# Altium PCB PCB1.PcbDoc
Units mil, origin at the board's own origin, x right, y up, seen from the top; angles counter-clockwise.
Board outline 3346.46 x 2204.72 mil, 2 copper layers (Top Layer, Bottom Layer); 34 components, 12 nets, 125 pads, 104 vias.
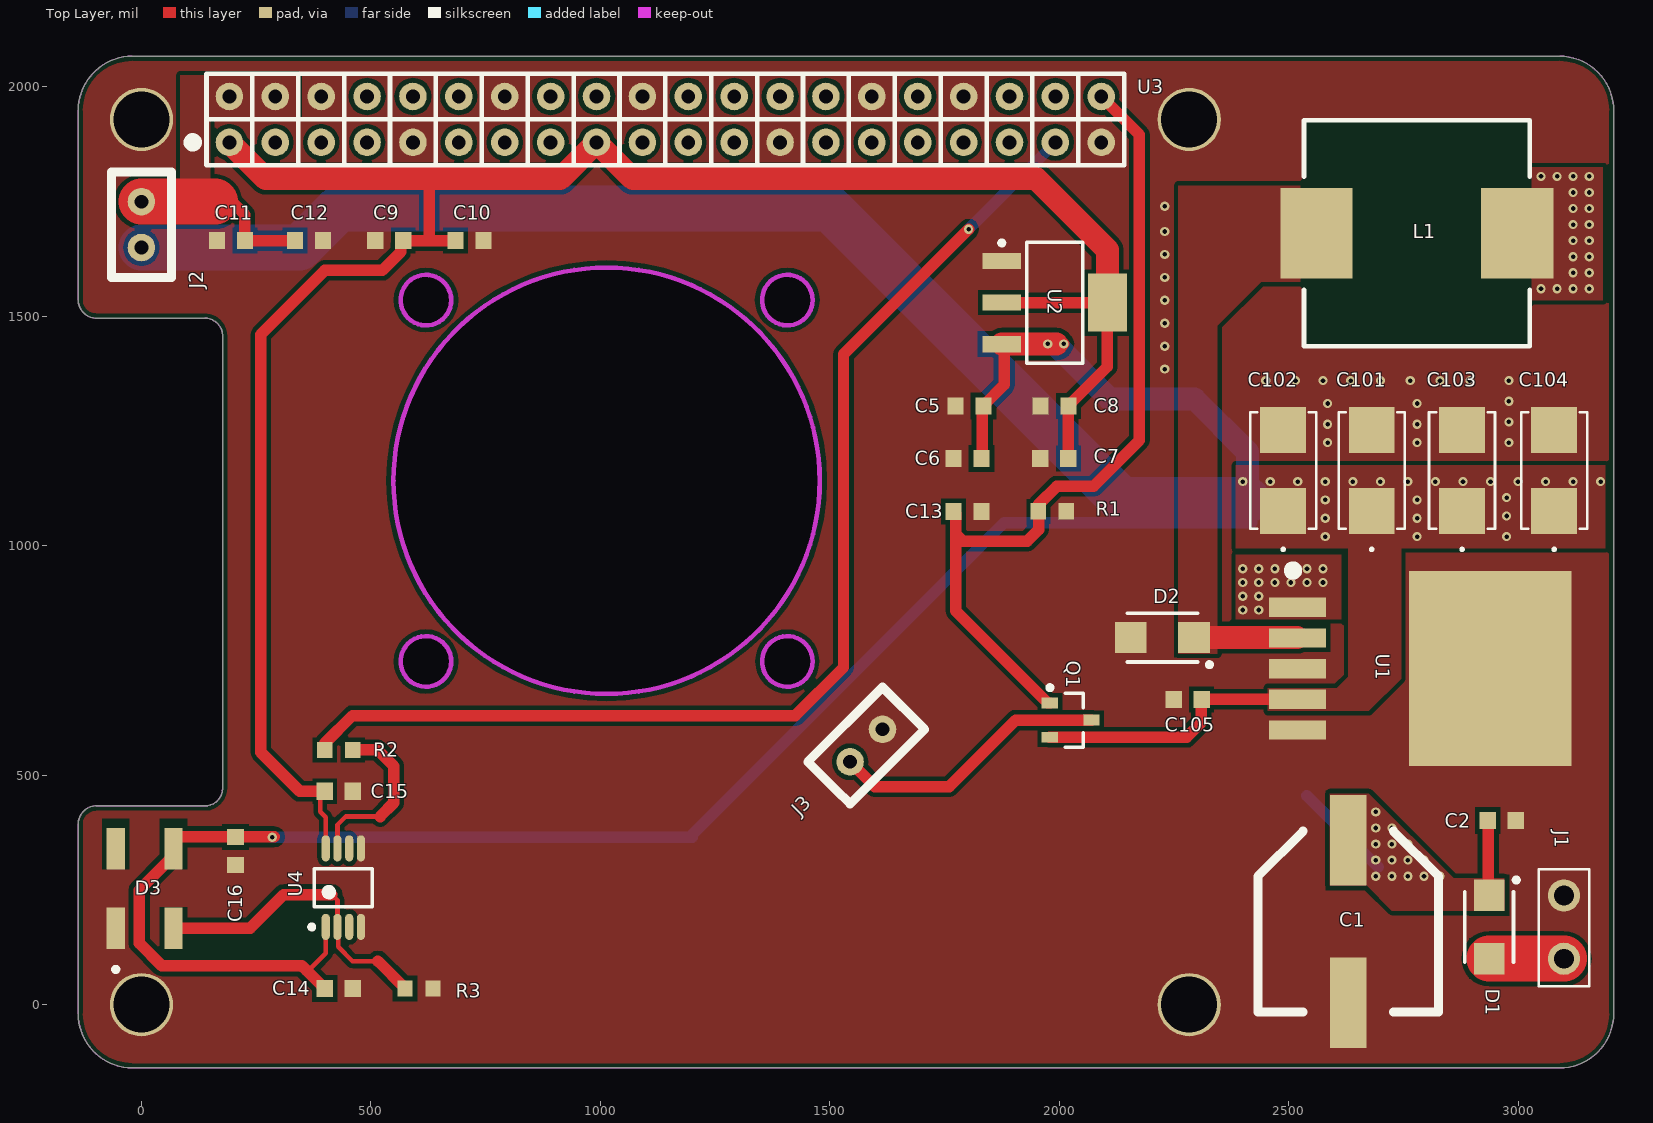
[diagram p0: Top Layer view]
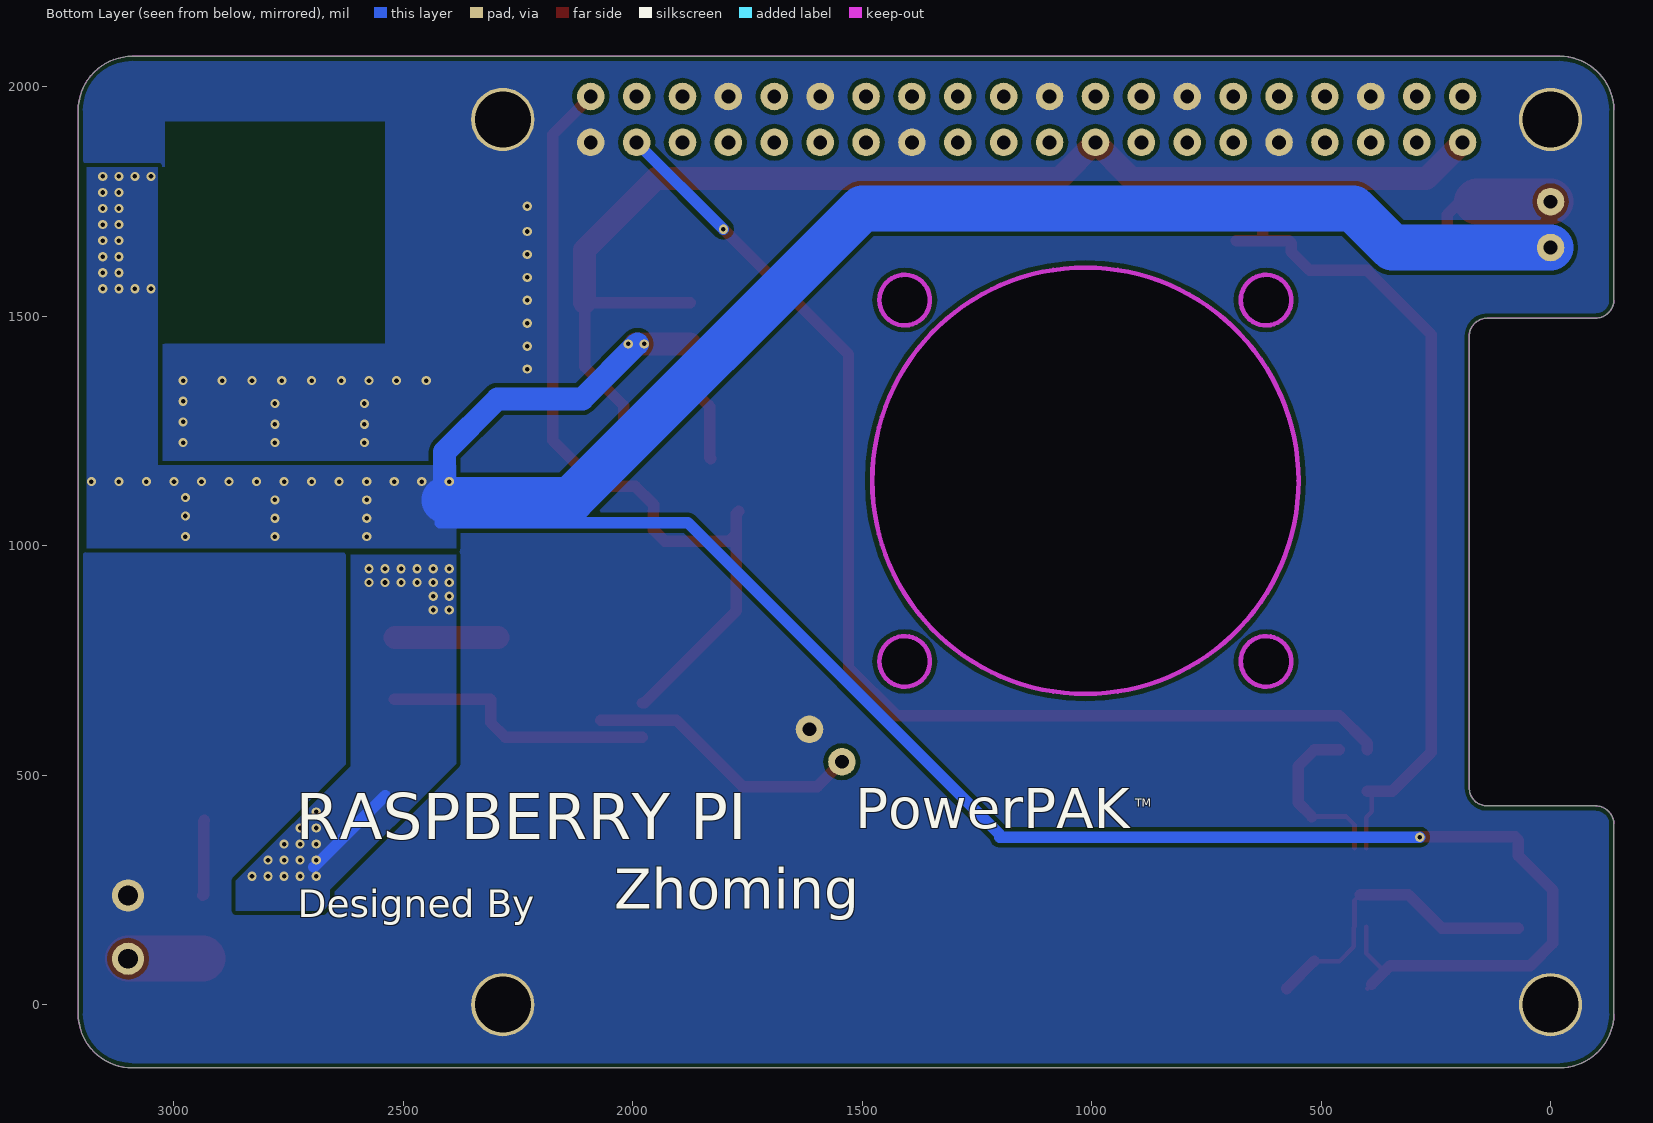
[diagram p1: Bottom Layer view, seen from below]
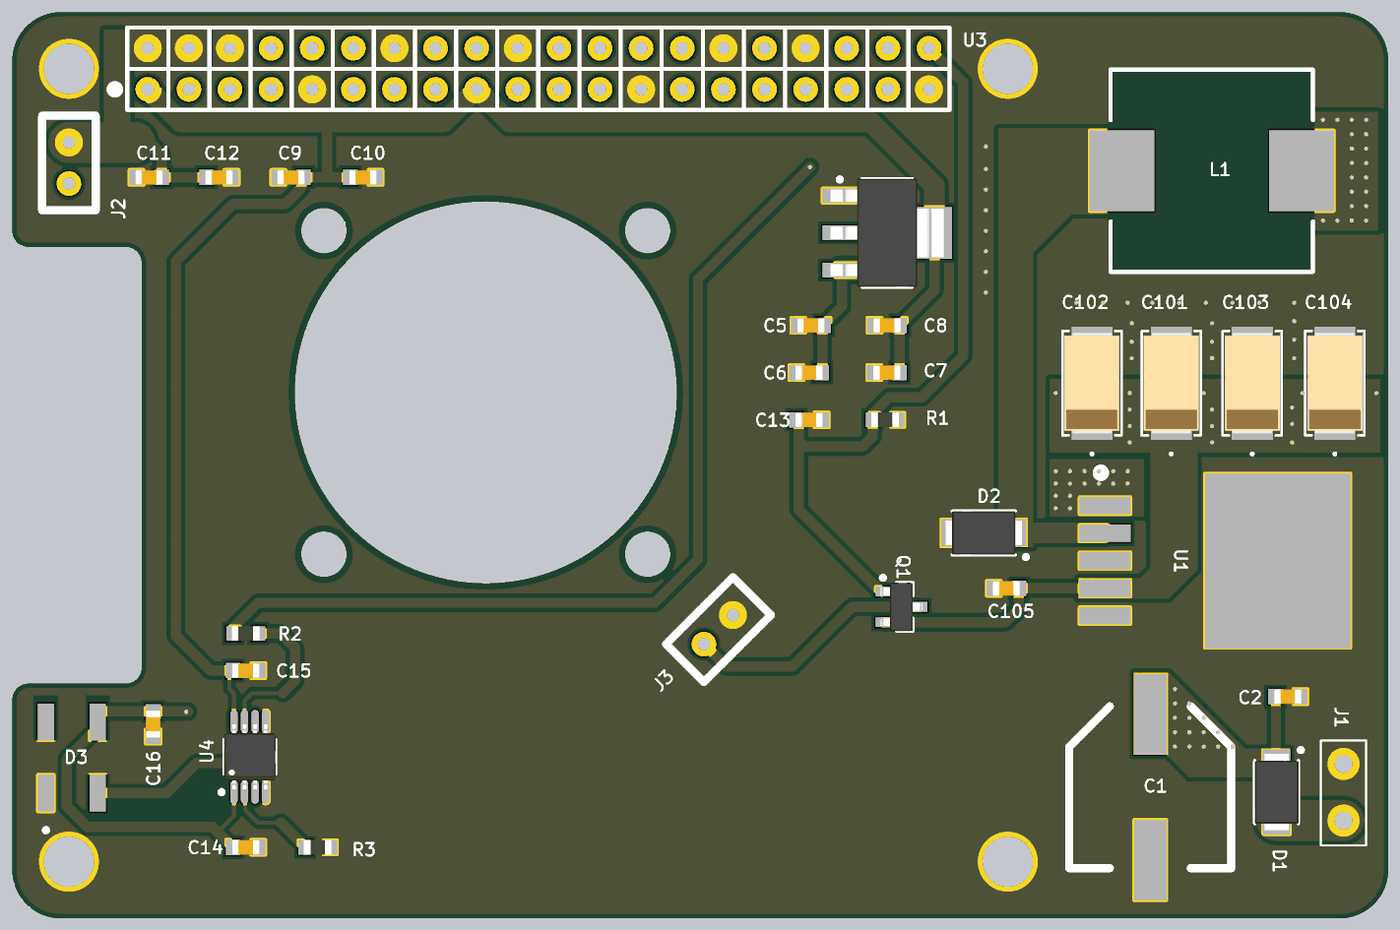
[diagram p2: 3D render of the assembled board from above, using the file's embedded part models]

## Layer stack, top to bottom
Top Solder: solder mask 0.4, Solder Resist, Dk 3.5
Top Layer: signal copper 1.4
Dielectric 1: dielectric 12.6, FR-4, Dk 4.8
Bottom Layer: signal copper 1.4
Bottom Solder: solder mask 0.4, Solder Resist, Dk 3.5

## Board outline
-137.8,-19.69 -137.8,393.7 cw(c-98.43,393.7) -98.43,433.07 137.8,433.07 ccw(c137.8,472.44) 177.17,472.44 177.17,1456.69 ccw(c137.8,1456.69) 137.8,1496.06 -98.43,1496.06 cw(c-98.43,1535.43) -137.8,1535.43 -137.8,1948.82 cw(c-19.69,1948.82) -19.69,2066.93 3090.55,2066.93 cw(c3090.55,1948.82) 3208.66,1948.82 3208.66,-19.69 cw(c3090.55,-19.69) 3090.55,-137.8 -19.69,-137.8 cw(c-19.69,-19.69)
cut-out: 1352.36,748.03 ccw(c1407.48,748.03) 1407.48,692.91 ccw(c1407.48,748.03) 1462.6,748.03 ccw(c1407.48,748.03) 1407.48,803.15 ccw(c1407.48,748.03)
cut-out: 564.96,748.03 ccw(c620.08,748.03) 620.08,692.91 ccw(c620.08,748.03) 675.2,748.03 ccw(c620.08,748.03) 620.08,803.15 ccw(c620.08,748.03)
cut-out: 1352.36,1535.43 ccw(c1407.48,1535.43) 1407.48,1480.31 ccw(c1407.48,1535.43) 1462.6,1535.43 ccw(c1407.48,1535.43) 1407.48,1590.55 ccw(c1407.48,1535.43)
cut-out: 620.08,1480.31 cw(c620.08,1535.43) 564.96,1535.43 cw(c620.08,1535.43) 620.08,1590.55 cw(c620.08,1535.43) 675.2,1535.43 cw(c620.08,1535.43)
cut-out: 549.21,1141.73 ccw(c1013.78,1141.73) 1013.78,677.17 ccw(c1013.78,1141.73) 1478.35,1141.73 ccw(c1013.78,1141.73) 1013.78,1606.3 ccw(c1013.78,1141.73)
cut-out: 896.7,1595.7

## Design rules (kind name [scope] priority, off if disabled: settings)
Clearance [All] p1: gap=10 ignorepadtopadclearanceinfootprint=FALSE except(0: Arc-Hole Track-Hole SMDPad-Hole THPad-Hole Via-Hole Fill-Hole Poly-Hole Region-Hole Text-Hole; 5: SMDPad-SMDPad SMDPad-Text)
HoleSize [All] p1: absolutevalues=TRUE maxlimit=500 minlimit=1 maxpercent=80.000 minpercent=20.000
PolygonConnect [All] p1: connectstyle=Direct reliefconductorwidth=10 reliefentries=4 polygonreliefangle="90 Angle" airgapwidth=10
RoomDefinition Sheet1 [InComponentClass('Sheet1')] p1 off: confinementstyle=ConfineIn formatcopy=TRUE lockcomponents=FALSE outline -2608.3,-2107.3 -2558.3,-2107.3 -2558.3,-2147.3 -2608.3,-2147.3
RoutingVias [All] p1: holewidth=10 width=10 viastyle="Through Hole" minholewidth=10 minwidth=10 maxholewidth=50 maxwidth=50
SilkToSolderMaskClearance [IsPad] p1: minsilkscreentomaskgap=2 clearancetoexposedcopper=TRUE
SolderMaskExpansion [All] p1: expansion=4
Width [All] p1: maxlimit=500 minlimit=5 preferedwidth=25 minimp=50.000000 maximp=50.000000 favimp=50.000000
28 further rules are at their usual default settings.

## Components (designator, comment, footprint, x,y, rotation, side; value= is the part's Value field where it differs from the comment)
C1 "ALCAP 560u" alcap-560uF 2629.92,181.1 r270 top
C2 "CAP_0603 1u" CAP_0603 2964.57,401.57 r180 top
C5 "CAP_0603 1u" CAP_0603 1804.49,1305 r0 top
C6 "CAP_0603 1u" CAP_0603 1800,1190 r0 top
C7 "CAP_0603 1u" CAP_0603 1989.49,1190 r0 top
C8 "CAP_0603 1u" CAP_0603 1990,1305 r0 top
C9 "CAP_0603 1u" CAP_0603 540,1665 r0 top
C10 "CAP_0603 0.1u" CAP_0603 715,1665 r180 top
C11 "CAP_0603 1u" CAP_0603 195,1665 r0 top
C12 "CAP_0603 0.1u" CAP_0603 365,1665 r180 top
C13 "CAP_0603 1u" CAP_0603 1800,1075 r180 top
C14 "CAP_0603 1u" CAP_0603 430,35 r180 top
C15 "CAP_0603 1u" CAP_0603 430,465 r180 top
C16 "CAP_0603 1u" CAP_0603 205,335 r90 top
C101 "Part Number: TAJC107K010RNJ" TAJC 2681.1,1164.13 r90 top value=Value
C102 "Part Number: TAJC107K010RNJ" TAJC 2488.19,1164.13 r90 top value=Value
C103 "Part Number: TAJC107K010RNJ" TAJC 2877.95,1164.13 r90 top value=Value
C104 "Part Number: TAJC107K010RNJ" TAJC 3078.74,1164.13 r90 top value=Value
C105 "CAP_0603 1u" CAP_0603 2280,665 r0 top
D1 "RBR3LAM60BTF_diode" RBR3LAM60BTF_diode 2937.01,169.29 r270 top
D2 "RBR3LAM60BTF_diode" RBR3LAM60BTF_diode 2225,800 r180 top
D3 "neopix" neopix -55.98,166.77 r270 top
J1 "2-pin terminal" "2-pin terminal" 3100,100 r90 top locked
J2 "jumper" 2pin_jumper 0,1650 r90 top locked
J3 "cooling_fan_jumper" 2pin_jumper 1544.29,529.29 r45 top
L1 "47uH" 732-11450-1-ND 2779.53,1681.1 r180 top
Q1 "BSH103" bsh103_MOS 2025,620 r0 top
R1 "RES_0603 4.7k" RES_0603 1985,1075 r180 top
R2 "RES_0603 10k" RES_0603 430,555 r0 top
R3 "RES_0603 10k" RES_0603 605,35 r180 top
U1 "LM2596-5.0" lm2956-5.0 2519.69,866.14 r180 top
U2 "LM1117-3.3" LM1117-3.3 1990,1530 r0 top
U3 "pi" pi 191.73,1879.13 r90 top locked
U4 "VSSOP-8" TSOP65P400X130-8M 440,255 r90 top

## Footprints (in the part's own frame and the unit in brackets; to place one, negate y for a bottom-side part, rotate by r counter-clockwise, add the part's x,y. Pads: shape width x height; smd on the part's side, far side on the other; paste and mask are expansions set on the pad)
"2-pin terminal" [mil]
  round 70 hole 43.31: 1(0,0) 2(137.8,0)
  silkscreen extent -60,-55 195,55
2pin_jumper [mil]
  round 60 hole 30: 1(0,0) 2(100,0)
  silkscreen extent -65,-65 165,65
732-11450-1-ND [mm]
  rect 4x5 smd: 1(5.55,0) 2(-5.55,0)
  Top Layer pour cut-out: 0.762,-7.62
  Top Layer pour cut-out: -6.35,6.35 6.35,6.35 6.35,-6.35 -6.35,-6.35
  silkscreen extent -6.25,-6.25 6.25,6.25
alcap-560uF [mm]
  rect 5x2 smd: 1(-4.5,0) 2(4.5,0)
  silkscreen extent -5,-5 5,5
bsh103_MOS [mm] "SOT23, 3-Leads, Body 2.90x2.30mm, Pitch 0.95mm, IPC Medium Density"
  rect 0.9x0.6 smd: 1(-1.15,0.95) 2(-1.15,-0.95) 3(1.15,0)
  silkscreen extent -1.27,-1.5 0.7,1.92, body extent -1.3,-1.5 1.3,1.5, height 1.1
CAP_0603 [mm] "Chip Capacitor, 2-Leads, Body 1.60x0.80mm, IPC Medium Density"
  rect 0.9x0.95 smd: 1(-0.775,0) 2(0.775,0)
  body extent -0.85,-0.45 0.85,0.45, height 0.5
LM1117-3.3 [mm] "LM1117-3.3"
  rect 2.15x0.9 smd: 1(-2.925,2.3) 2(-2.925,0) 3(-2.925,-2.3)
  rect 2.15x3.2 smd: 2(2.925,0)
  silkscreen extent -3.05,-3.35 1.55,3.42, body extent -3.5,-3.35 3.5,3.35, height 1.8
lm2956-5.0 [mm]
  rect 3.16x1.07 smd: 1(0,0) 2(0,1.7) 3(0,3.4) 4(0,5.1) 5(0,6.8)
  rect 9x10.8 smd: 3(-10.67,3.4)
  silkscreen extent 0,-2.29 0.51,-1.78
neopix [mm]
  rect 2.286x1 smd: 1(0,0) 2(0,3.2) 3(-4.4,3.2) 4(-4.4,0)
  silkscreen extent 2.16,-0.13 2.41,0.13
pi [mil]
  round 60 hole 30: 1(0,0) 2(0,-100) 3(0,-200) 4(0,-300) 5(0,-400) 6(0,-500) 7(0,-600) 8(0,-700) 9(0,-800) 10(0,-900) 11(0,-1000) 12(0,-1100) 13(0,-1200) 14(0,-1300) 15(0,-1400) 16(0,-1500) 17(0,-1600) 18(0,-1700) 19(0,-1800) 20(0,-1900) 21(100,-1900) 22(100,-1800) 23(100,-1700) 24(100,-1600) 25(100,-1500) 26(100,-1400) 27(100,-1300) 28(100,-1200) 29(100,-1100) 30(100,-1000) 31(100,-900) 32(100,-800) 33(100,-700) 34(100,-600) 35(100,-500) 36(100,-400) 37(100,-300) 38(100,-200) 39(100,-100) 40(100,0)
  silkscreen extent -50,-1950 150,90
RBR3LAM60BTF_diode [mm] "SODFL, 2-Leads, Body 2.50x4.70mm, IPC Medium Density"
  rect 1.75x1.7 smd: 1(-1.75,0) 2(1.75,0)
  silkscreen extent -2.72,-1.35 1.95,1.63, body extent -2.35,-1.35 2.35,1.35, height 1.05
RES_0603 [mm] "Chip Resistor, 2-Leads, Body 1.60x0.80mm, IPC Medium Density"
  rect 0.85x0.9 smd: 1(-0.775,0) 2(0.775,0)
  body extent -0.85,-0.45 0.85,0.45, height 0.5
TAJC [mil]
  rect 100x100 smd paste+0 mask+0: 1(-88,0) 2(88,0)
  silkscreen extent -175,-72 127,72, body extent -122,-67 122,67, height 112
TSOP65P400X130-8M [mm] "TSOP, 8-Leads, Body 2.95x2.80mm, Pitch 0.65mm, IPC Low Density"
  oval 1.45x0.45 smd: 1(-2.175,0.975) 2(-2.175,0.325) 3(-2.175,-0.325) 4(-2.175,-0.975) 5(2.175,-0.975) 6(2.175,-0.325) 7(2.175,0.325) 8(2.175,0.975)
  silkscreen extent -2.3,-1.6 1.05,1.87, body extent -2,-1.6 2,1.6, height 1.3

## Part data
C1: library part ALCAP_47UF, "ALCAP", ComponentLink1Description=EEUFR1J470, ComponentLink1URL=https://www.digikey.com/product-detail/en/panasonic-electronic-components/EEU-FR1J470/P15400-ND/3072280
C2 C5 C6 C7 C8 C9 C10 C11 C12 C13 C14 C15 C16 C105: library part CAP_0603, "CAP_0603", ComponentLink1Description=C0603C105K4RACTU, ComponentLink1URL=https://www.digikey.com/product-detail/en/kemet/C0603C105K4RACTU/399-7847-1-ND/3471570
C101 C102 C103 C104: library part TAJC107K010RNJ, "No Description Available", Built_By=EMA_UL_Team, Copyright="Copyright (C) 2018 Accelerated Designs. All rights reserved", Manufacturer_Part_Number=TAJC107K010RNJ, RefDes=RefDes, Type=DEV, Vendor="AVX Corporation"
J2 J3: library part 2pin_jumper
  J2: ComponentLink1Description=WM23944-ND, ComponentLink1URL=https://www.digikey.com/product-detail/en/molex/0015381026/WM23944-ND/315124
  J3: ComponentLink1Description=563-1111-ND, ComponentLink1URL=https://www.digikey.com/product-detail/en/nidec-copal-electronics/F251R-05LLC/563-1111-ND/1165505
L1: library part 732-11450-1-ND, ComponentLink1Description=732-11450-1-ND, ComponentLink1URL=https://www.digikey.com/product-detail/en/w-rth-elektronik/744373965470/732-11450-1-ND/7323676
Q1: library part MOSFET_N_1
R1 R2 R3: library part RES_0603, "RES_0603 1/8 W"
U4: library part SN74LVC2T45
D1 D2: ComponentLink1Description=RBR3LAM60BTF, ComponentLink1URL=https://www.digikey.com/product-detail/en/rohm-semiconductor/RBR3LAM60BTFTR/RBR3LAM60BTFCT-ND/8702638

## Free pads (board coordinates)
  round 137.8 hole 122.05: 0(0,0) 0(0,1929.13) 0(2283.46,0) 0(2283.46,1929.13)

## Via types
v1: diameter 20, hole 10, Top Layer to Bottom Layer, tented both sides, 104 vias

## Nets (pads, with @x,y where several pads share a name; then routed paths per layer and width w, separated by ;. In a path a pad name is that pad's centre, name@x,y a point inside that pad or via, vN(x,y) a via of type N, cw(c..) or ccw(c..) an arc to the next point about the centre after c; other vN are vias at no path point)
3.3V: C7.2 C8.2 C9.2 C10.2 C15.2 U2.2 U3.1 U3.9 U4.8 | length 4671.3
  Top Layer w10: C15.2 390,455.51 390,420 401.61,408.39 U4.8
  Top Layer w25: C15.2 345,465 260,550 260,1460.36 399.64,1600 525,1600 565.3,1640.3 565.3,1659.78 C9.2 627.5,1665 ; 625,1800 627.5,1797.5 627.5,1665 ; C10.2 627.5,1665 ; U2.2@1874.84,1530 2105.16,1530 2105.16,1390.63 2020.51,1305.98 C8.2 2020.26,1304.74 2020.26,1190.26 C7.2
  Top Layer w50: U3.1 270.87,1800 625,1800 912.6,1800 U3.9 1070.87,1800 1950,1800 2105.16,1644.84 U2.2@2105.16,1530
5V: C5.2 C6.2 C14.2 C16.2 C101.1 C102.1 C103.1 C104.1 C105.2 D3.3 J2.1 L1.2 Q1.2 U1.4 U2.3 U4.1 | length 7781.3
  Top Layer w10: 359.49,75 365,75 401.61,111.61 U4.1 ; C14.2@390,44.49 C14.2
  Top Layer w25: v1@289.49,365.51 C16.2 77.19,365.51 70,358.33 D3.3 70,324.69 -5,249.69 -5,134.26 44.26,85 349.49,85 359.49,75 C14.2@390,44.49 ; C6.2 1832.76,1192.24 1832.76,1302.76 C5.2 1835,1305.98 1880,1350.98 1880,1434.29 U2.3 ; Q1.2 2277.6,582.6 2310,615 2310,664.49 C105.2 2310.69,665.18 2519.35,665.18 2519.61,665.43 U1.4 ; v1@2009.45,1439.45 v1(2010,1440)
  Top Layer w50: U2.3 1994.45,1439.45
  Bottom Layer w25: v1(285,365) 1200,365 ; 1200,370 1880,1050 2420,1050
  Bottom Layer w50: 1990,1440 2110,1320 2295,1320 2410,1205 2410,1100
  Bottom Layer w100: J2.1 345,1650 430,1735 1500,1735 2135,1100 2410,1100
  other v1: 2580,1020 2780,1020 2975,1020 2580,1060 2780,1060 2975,1065 2580,1100 2780,1100 2975,1105 2400,1140 2460,1140 2520,1140 2580,1140 2640,1140 2700,1140 2760,1140 2820,1140 2880,1140 2940,1140 3000,1140 3060,1140 3120,1140 3180,1140 1975,1440 3050,1560 3085,1560 3120,1560 3155,1560 3120,1595 3155,1595 3120,1630 3155,1630 3120,1665 3155,1665 3120,1700 3155,1700 3120,1735 3155,1735 3120,1770 3155,1770 3050,1805 3085,1805 3120,1805 3155,1805
D3.3: R2.1 U3.19 | length 2548.9
  Top Layer w25: R2.1 399.49,569.49 460,630 1425,630 1530,735 1530,1417.4 v1(1802.6,1690)
  Bottom Layer w25: v1(1802.6,1690) U3.19
D5.0: D3.2 R3.2 U4.2 | length 678.9
  Top Layer w10: 415,240 427.2,227.8 U4.2 428.68,167.89 428.68,126.32 460,95 515.47,95
  Top Layer w25: D3.2 236.77,166.77 310,240 415,240 ; 515.47,95 574.49,35.98 R3.2
fan: C13.2 Q1.1 R1.2 U3.21 | length 1821.4
  Top Layer w25: C13.2 1774.7,1069.78 1774.7,1025.3 ; Q1.1 1975.2,657.4 1774.7,857.89 1774.7,1025.3 ; U3.21 2175,1895.87 2175,1230 2075,1130 1995,1130 1954.49,1089.49 R1.2 1955,1074.49 1955,1035 1930,1010 1790,1010 1774.7,1025.3
GND: C1.2 C2.1 C5.1 C6.1 C7.1 C8.1 C9.1 C10.1 C11.1 C12.1 C13.1 C14.1 C15.1 C16.1 C101.2 C102.2 C103.2 C104.2 C105.1 D2.2 D3.1 J1.2 J3.2 pad.0 R1.1 R3.1 U1.3 U1.5 U2.1 U3.5 U3.13 U3.20 U3.24 U3.26 U3.31 U3.34 U3.38 U4.4 U4.5
  other v1: 2585,1225 2780,1225 2980,1225 2585,1265 2780,1265 2980,1270 2585,1310 2780,1310 2980,1315 2450,1360 2515,1360 2575,1360 2635,1360 2700,1360 2765,1360 2830,1360 2895,1360 2980,1360 2230,1385 2230,1435 2230,1485 2230,1535 2230,1585 2230,1635 2230,1685 2230,1740
NetC1_1: C1.1 C2.2 D1.1 U1.1 | length 383.8
  Top Layer w25: C2.2 2935.53,400.1 2935.53,239.67 D1.1
  Bottom Layer w25: 2540,455 2695,300
  other v1: 2690,280 2725,280 2760,280 2795,280 2830,280 2690,315 2725,315 2760,315 2795,315 2690,350 2725,350 2760,350 2690,385 2725,385 2690,420 2400,860 2435,860 2400,890 2435,890 2400,920 2435,920 2470,920 2505,920 2540,920 2575,920 2400,950 2435,950 2470,950 2505,950 2540,950 2575,950
NetC11_2: C11.2 C12.2 J2.2 U3.39 U3.40 | length 403.8
  Top Layer w25: 160,1750 196.71,1750 225.51,1721.2 C11.2 C12.2 ; U3.40@190.87,1980 U3.40
  Top Layer w100: J2.2 160,1750
NetD1_2: D1.2 J1.1 | length 163.2
  Top Layer w25: D1.2 D1.2@2937.2,100.2 ; J1.1@3099.8,100.2 J1.1
  Top Layer w100: D1.2@2937.2,100.2 J1.1@3099.8,100.2
NetD2_1: D2.1 L1.1 U1.2 | length 226.4
  Top Layer w25: D2.1 D2.1@2293.9,800.2 ; U1.2@2518.7,800.2 U1.2
  Top Layer w50: D2.1@2293.9,800.2 U1.2@2518.7,800.2
NetJ3_1: J3.1 Q1.3 | length 608.5
  Top Layer w25: J3.1 1598.58,475 1760,475 1905,620 Q1.3
NetR2_2: R2.2 U4.7 | length 378.2
  Top Layer w10: U4.7 427.2,392.2 445,410 520,410
  Top Layer w25: R2.2 515,555 550,520 550,440 520,410
pads on no net: D3.4 U3.2 U3.3 U3.4 U3.6 U3.7 U3.8 U3.10 U3.11 U3.12 U3.14 U3.15 U3.16 U3.17 U3.18 U3.22 U3.23 U3.25 U3.27 U3.28 U3.29 U3.30 U3.32 U3.33 U3.35 U3.36 U3.37 U4.3 U4.6

## Polygon pours and split planes (outlines as drawn)
GND on Top Layer "GND_L01_P072" (solid, remove dead copper, pour order 72): -137.8,-19.69 -137.8,393.7 cw(c-98.43,393.7) -98.43,433.07 137.8,433.07 ccw(c137.8,472.44) 177.17,472.44 177.17,1456.69 ccw(c137.8,1456.69) 137.8,1496.06 -98.43,1496.06 cw(c-98.43,1535.43) -137.8,1535.43 -137.8,1948.82 cw(c-19.69,1948.82) -19.69,2066.93 3090.55,2066.93 cw(c3090.55,1948.82) 3208.66,1948.82 3208.66,-19.69 cw(c3090.55,-19.69) 3090.55,-137.8 -19.69,-137.8 cw(c-19.69,-19.69)
NetC11_2 on Top Layer "NETC11_2_L01_P070" (solid, remove dead copper, pour order 70): 85,1725 85,2025 340,2025 340,1935 150,1935 150,1725
NetC1_1 on Top Layer "NETC1_1_L01_P058" (solid, remove dead copper, pour order 58): 2385,980 2615,980 2615,840 2385,840
5V on Top Layer "5V_L01_P056" (solid, remove dead copper, pour order 56): 2455,690 2605,690 2630,715 2630,1010 2745,1010 2745,710 2675,640 2455,640
NetC1_1 on Top Layer "NETC1_1_L01_P050" (solid, remove dead copper, pour order 50): 2590,460 2675,460 2860,275 2970,275 2970,205 2725,205 2670,260 2590,260
5V on Top Layer "5V_L01_P044" (solid, remove dead copper, pour order 44): 3030,1825 3185,1825 3185,1535.43 3030,1535.43
5V on Top Layer "5V_L01_P042" (solid, remove dead copper, pour order 42): 2385,1175 2385,995 3190,995 3190,1175
NetD2_1 on Top Layer "NETD2_1_L01_P040" (solid, remove dead copper, pour order 40): 2260,765 2260,1785 2525,1785 2525,1575 2440,1575 2345,1480 2345,765
no net on Top Layer "NONET_L01_P034" (solid, remove dead copper, pour order 34): 1945,820
no net on Top Layer "NONET_L01_P032" (solid, remove dead copper, pour order 32): 1930,635
no net on Top Layer "NONET_L01_P028" (solid, remove dead copper, pour order 28): 715,300
GND on Bottom Layer "GND_L02_P068" (solid, remove dead copper, pour order 68): -137.8,-19.69 -137.8,393.7 cw(c-98.43,393.7) -98.43,433.07 137.8,433.07 ccw(c137.8,472.44) 177.17,472.44 177.17,1456.69 ccw(c137.8,1456.69) 137.8,1496.06 -98.43,1496.06 cw(c-98.43,1535.43) -137.8,1535.43 -137.8,1948.82 cw(c-19.69,1948.82) -19.69,2066.93 3090.55,2066.93 cw(c3090.55,1948.82) 3208.66,1948.82 3208.66,-19.69 cw(c3090.55,-19.69) 3090.55,-137.8 -19.69,-137.8 cw(c-19.69,-19.69)
no net on Bottom Layer "NONET_L02_P062" (solid, remove dead copper, pour order 62): 3245,265
NetC1_1 on Bottom Layer "NETC1_1_L02_P060" (solid, remove dead copper, pour order 60): 2385,980 2615,980 2615,520 2865,270 2865,205 2675,205 2660,220 2660,250 2385,525
5V on Bottom Layer "5V_L02_P048" (solid, remove dead copper, pour order 48): 3035,1825 3190,1825 3190,1160 3035,1160
5V on Bottom Layer "5V_L02_P046" (solid, remove dead copper, pour order 46): 2385,1175 3190,1175 3190,995 2385,995

## Keep-outs
Keep-Out Layer:
  circle w0.5: c1013.78,1141.73 r464.57
  circle w0.5: c620.08,748.03 r55.12
  circle w0.5: c620.08,1535.43 r55.12
  circle w0.5: c1407.48,748.03 r55.12
  circle w0.5: c1407.48,1535.43 r55.12
  circle w10: c1013.78,1141.73 r464.57
  circle w10: c620.08,748.03 r55.12
  circle w10: c620.08,1535.43 r55.12
  circle w10: c1407.48,748.03 r55.12
  circle w10: c1407.48,1535.43 r55.12
  lines w0.5: -137.8,-19.69 ccw(c-19.69,-19.69) -19.69,-137.8 3090.55,-137.8 ccw(c3090.55,-19.69) 3208.66,-19.69 3208.66,1948.82 ccw(c3090.55,1948.82) 3090.55,2066.93 2303.15,2066.93 -19.69,2066.93 ccw(c-19.69,1948.82) -137.8,1948.82 -137.8,1535.43 ccw(c-98.43,1535.43) -98.43,1496.06 137.8,1496.06 cw(c137.8,1456.69) 177.17,1456.69 177.17,472.44 cw(c137.8,472.44) 137.8,433.07 -98.43,433.07 ccw(c-98.43,393.7) -137.8,393.7 -137.8,-19.69

## Other copper
Bottom Layer:
  pour cut-out: 2540,1440 3020,1440 3020,1925 2540,1925

## Silkscreen, mask and mechanical layers (free items; w line width, h text height)
Bottom Overlay:
  text "TM" at 905,425 h30
  text "RASPBERRY PI" at 2735,360 h100
  text "PowerPAK" at 1515,355 h150
  text "Designed By" at 2730,190 h60
  text "Zhoming" at 2040,180 h150
Mechanical 1:
  lines w0.5: -137.8,-19.69 ccw(c-19.69,-19.69) -19.69,-137.8 3090.55,-137.8 ccw(c3090.55,-19.69) 3208.66,-19.69 3208.66,1948.82 ccw(c3090.55,1948.82) 3090.55,2066.93 2303.15,2066.93 -19.69,2066.93 ccw(c-19.69,1948.82) -137.8,1948.82 -137.8,1535.43 ccw(c-98.43,1535.43) -98.43,1496.06 137.8,1496.06 cw(c137.8,1456.69) 177.17,1456.69 177.17,472.44 cw(c137.8,472.44) 137.8,433.07 -98.43,433.07 ccw(c-98.43,393.7) -137.8,393.7 -137.8,-19.69